# Altium PCB 100872.pcbdoc
Units mm, origin at the board's own origin, x right, y up, seen from the top; angles counter-clockwise.
Board outline 50 x 10 mm, 2 copper layers (Top Layer, Bottom Layer), stack 1.471 mm thick; 12 components, 5 nets, 23 pads, 10 vias.
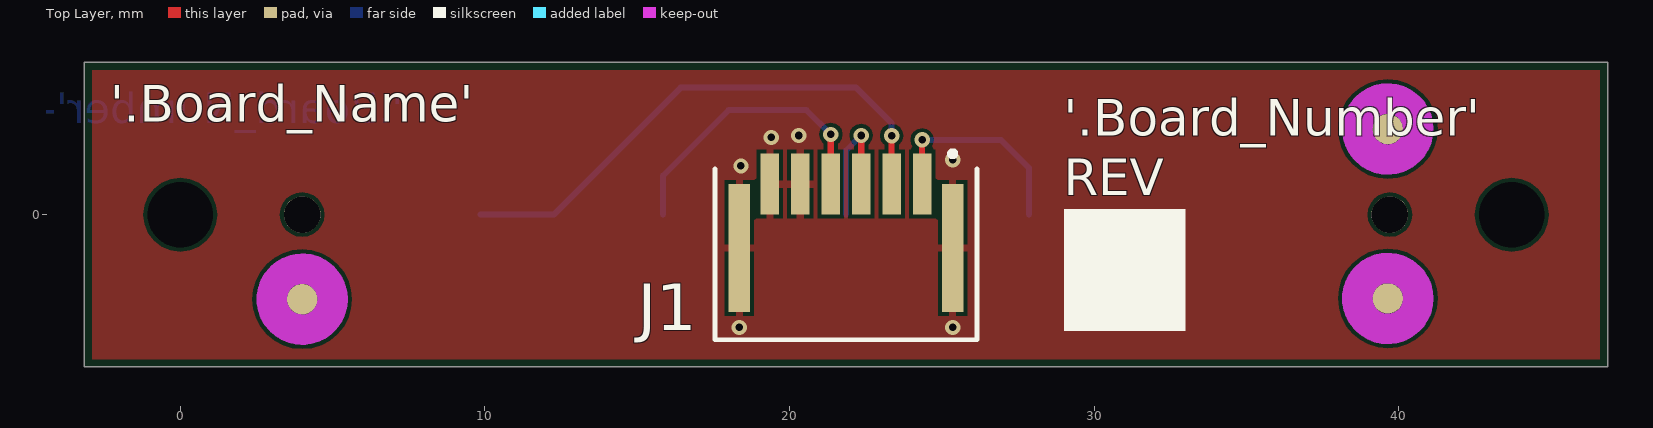
[diagram p0: Top Layer view]
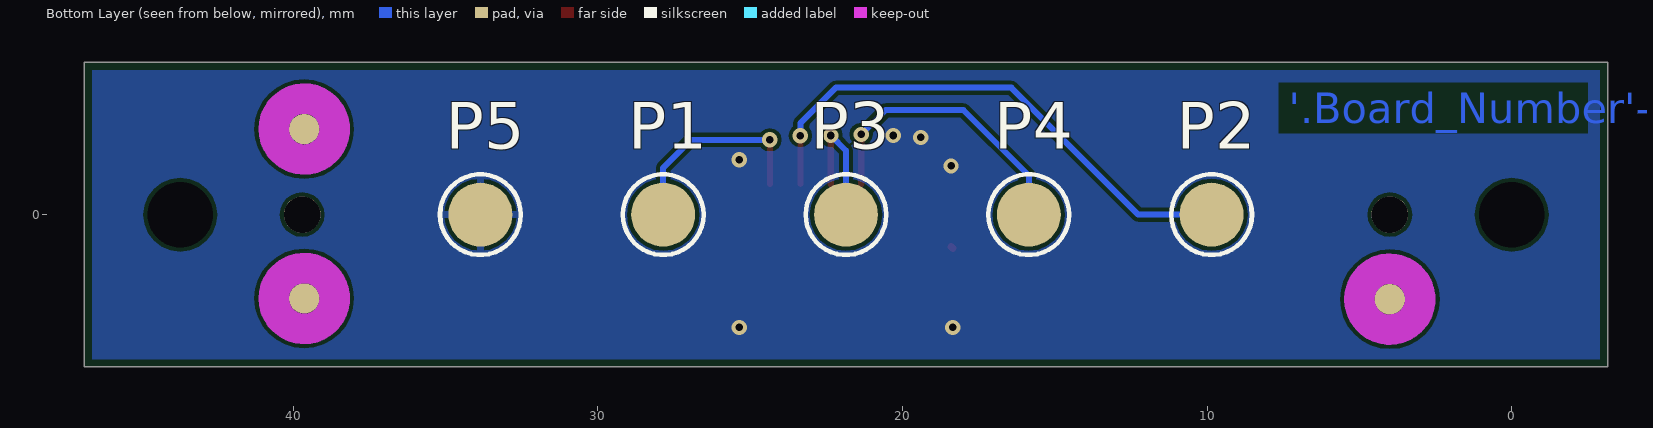
[diagram p1: Bottom Layer view, seen from below]

## Layer stack, top to bottom
Top Solder: solder mask 0.0102, Solder Resist, Dk 3.5
Top Layer: signal copper 0.0356
Dielectric 1: core 1.4, FR-4, Dk 4.2
Bottom Layer: signal copper 0.0356
Bottom Solder: solder mask 0.0102, Solder Resist, Dk 3.5

## Board outline
-3.15,-5 46.85,-5 46.85,5 -3.15,5

## Design rules (kind name [scope] priority, off if disabled: settings)
BoardOutlineClearance [All] p1: gap=0.25 except(0: Text-OutlineEdge)
Clearance [All] p1: gap=0.125
ComponentClearance [All] p1: gap=0.18 collisioncheckmode=3 verticalgap=0.18 showdistances=FALSE
HoleSize [All] p1: absolutevalues=TRUE maxlimit=2.7 minlimit=0.025 maxpercent=80.000 minpercent=20.000
MinimumSolderMaskSliver MinimumSolderMaskSliver_1 [isvia vs IsPad] p1: minsoldermaskwidth=0
MinimumSolderMaskSliver [All] p2: minsoldermaskwidth=0.05
PlaneClearance [All] p1: clearance=0.2
PlaneConnect [All] p1: planeconnectstyle=Direct reliefexpansion=0.508 reliefentries=4 reliefconductorwidth=0.254 reliefairgap=0.254
PolygonConnect MTG [InPadClass('Thick_thermal')] p1: connectstyle=Relief reliefconductorwidth=0.4 reliefentries=4 polygonreliefangle="90 Angle" airgapwidth=0.125
PolygonConnect POLY_VIA [IsVia vs IsPolygon] p2: connectstyle=Direct reliefconductorwidth=0.254 reliefentries=4 polygonreliefangle="90 Angle" airgapwidth=0.254
PolygonConnect PolygonConnect_1 [All] p3: connectstyle=Relief reliefconductorwidth=0.25 reliefentries=4 polygonreliefangle="90 Angle" airgapwidth=0.125
RoomDefinition Handle_Interconnect [InComponentClass('Handle_Interconnect')] p1: confinementstyle=ConfineIn formatcopy=TRUE lockcomponents=FALSE outline -2.985,-5.067 47.079,-5.067 47.079,5 -2.985,5
RoutingVias [All] p1: holewidth=0.25 width=0.5 viastyle="Through Hole" minholewidth=0.25 minwidth=0.5 maxholewidth=0.25 maxwidth=0.5
SilkToSilkClearance [All] p1 off: silktosilkclearance=0.05
SilkToSolderMaskClearance [IsPad] p1: minsilkscreentomaskgap=0.125 clearancetoexposedcopper=TRUE
SolderMaskExpansion [All] p1: expansion=0.05
Width PWR_GND [InNetClass('PWR_GND')] p1: maxlimit=0.25 minlimit=0.25 preferedwidth=0.25
Width CRITICAL [InNetClass('MOTOR_DRIVERS')] p2: maxlimit=0.4 minlimit=0.3 preferedwidth=0.4
Width [All] p3: maxlimit=0.5 minlimit=0.125 preferedwidth=0.125
23 further rules are at their usual default settings.

## Classes and differential pairs
pad class Thick_thermal: Free-1
net class PWR_GND: GND
component class Handle_Interconnect: J1 P1 P2 P3 P4 P5

## Components (designator, comment, footprint, x,y, rotation, side; value= is the part's Value field where it differs from the comment)
J1 "HFW6R-2STE1LF" CON_FCI_HFW6R 21.85,0 r180 top
P1 "POGO_137" POGO_MILLMAX_0900-76 27.85,0 r180 bottom
P2 "POGO_137" POGO_MILLMAX_0900-76 9.85,0 r180 bottom
P3 "POGO_137" POGO_MILLMAX_0900-76 21.85,0 r180 bottom
P4 "POGO_137" POGO_MILLMAX_0900-76 15.85,0 r180 bottom
P5 "POGO_137" POGO_MILLMAX_0900-76 33.85,0 r180 bottom
? "Comment" Fiducial_c100opening300 4,-2.775 r0 top
? "Comment" Fiducial_c100opening300 39.634,2.81 r0 top
? "Comment" Fiducial_c100opening300 39.634,-2.75 r0 top
? "Comment" Fiducial_c100opening300 4,-2.775 r180 bottom
? "Comment" Fiducial_c100opening300 39.634,2.81 r180 bottom
? "Comment" Fiducial_c100opening300 39.634,-2.75 r180 bottom

## Footprints (in the part's own frame and the unit in brackets; to place one, negate y for a bottom-side part, rotate by r counter-clockwise, add the part's x,y. Pads: shape width x height; smd on the part's side, far side on the other; paste and mask are expansions set on the pad)
CON_FCI_HFW6R [mm] "CON_JST_S3B-ZR-SM4A"
  rect 0.6x2 smd mask+0.05: 1(2.5,-1) 2(1.5,-1) 3(0.5,-1) 4(-0.5,-1) 5(-1.5,-1) 6(-2.5,-1)
  rect 0.7x4.2 smd mask+0.05: 7(3.5,1.1) 8(-3.5,1.1)
  silkscreen extent -4.3,-2.09 4.3,4.1, body extent -4.3,-1.6 4.3,4.1, height 2
Fiducial_c100opening300 [mm]
  round 1 smd paste-10 mask+1: 0(0,0)
  Top Layer keep-out circle w1: c0,0 r1
POGO_MILLMAX_0900-76 [mm] "CONN SPRING LOADED PIN .137 GOLD"
  round 2.1 smd mask+0.05: 1(0,0)
  silkscreen extent -1.33,-1.32 1.33,1.32, body extent -0.91,-0.92 0.92,0.92, height 3.49

## Part data
J1: "CONN FFC FPC TOP 6POS 1.00MM R/A"
P1 P2 P3 P4 P5: library part 0900-0-15-20-76-14-11-0, "CONN SPRING LOADED PIN .137 GOLD"

## Free pads (board coordinates)
  round 1.2 hole 1.2 unplated: 0(4,0) 0(39.7,0)
  round 2 hole 2.15 unplated: 1(0,0) 1(43.7,0)

## Via types
v1: diameter 0.5, hole 0.25, Top Layer to Bottom Layer, tented both sides, 10 vias

## Nets (pads, with @x,y where several pads share a name; then routed paths per layer and width w, separated by ;. In a path a pad name is that pad's centre, name@x,y a point inside that pad or via, vN(x,y) a via of type N, cw(c..) or ccw(c..) an arc to the next point about the centre after c; other vN are vias at no path point)
BTN_MENU: J1.6 P1.1 | length 6.9
  Top Layer w0.2: J1.6 v1(24.35,2.457)
  Bottom Layer w0.2: v1(24.35,2.457) 26.93,2.457 27.85,1.536 P1.1
BTN_SYS: J1.3 P4.1 | length 9.6
  Top Layer w0.2: J1.3 v1(21.35,2.633)
  Bottom Layer w0.2: P4.1 15.85,1.285 18,3.435 20.549,3.435 v1(21.35,2.633)
BTN_TRACK: J1.4 P3.1 | length 4.4
  Top Layer w0.2: J1.4 v1(22.35,2.6)
  Bottom Layer w0.2: P3.1 21.85,2.1 v1(22.35,2.6)
BTN_TRIG: J1.5 P2.1 | length 17.7
  Top Layer w0.2: J1.5 v1(23.35,2.592)
  Bottom Layer w0.2: P2.1 12.257,0 16.425,4.168 22.182,4.168 23.35,3 v1(23.35,2.592)
GND: J1.1 J1.2 J1.7 J1.8 P5.1 | length 0.1
  Top Layer w0.25: J1.7 J1.7@18.4,-1.05
  other v1: 18.35,-3.7 25.35,-3.7 18.4,1.6 25.35,1.8 19.4,2.537 20.3,2.6
pads on no net: ?.0

## Polygon pours and split planes (outlines as drawn)
no net on FAB_DWG (solid): -327.868,-0.5 -326.868,-4.5 -327.868,-4 -328.868,-4.5 -327.868,-0.5
no net on FAB_DWG (solid): -327.868,23.5 -328.868,27.5 -327.868,27 -326.868,27.5 -327.868,23.5
no net on FAB_DWG (solid): -270.368,0 ccw(c-270.868,0) -270.868,0.5 ccw(c-270.868,0) -271.368,0 ccw(c-270.868,0) -270.868,-0.5 ccw(c-270.868,0) -270.368,0
no net on FAB_DWG (solid): -268.368,0 ccw(c-268.868,0) -268.868,0.5 ccw(c-268.868,0) -269.368,0 ccw(c-268.868,0) -268.868,-0.5 ccw(c-268.868,0) -268.368,0
no net on FAB_DWG (solid): -240.768,8.5 -241.268,7 -272.468,7 -272.968,8.5 -240.768,8.5
no net on FAB_DWG (solid): -272.968,15.5 -272.468,17 -241.268,17 -240.768,15.5 -272.968,15.5
no net on FAB_DWG (solid): -270.368,24 ccw(c-270.868,24) -270.868,24.5 ccw(c-270.868,24) -271.368,24 ccw(c-270.868,24) -270.868,23.5 ccw(c-270.868,24) -270.368,24
no net on FAB_DWG (solid): -268.368,24 ccw(c-268.868,24) -268.868,24.5 ccw(c-268.868,24) -269.368,24 ccw(c-268.868,24) -268.868,23.5 ccw(c-268.868,24) -268.368,24
no net on FAB_DWG (solid): -266.368,0 ccw(c-266.868,0) -266.868,0.5 ccw(c-266.868,0) -267.368,0 ccw(c-266.868,0) -266.868,-0.5 ccw(c-266.868,0) -266.368,0
no net on FAB_DWG (solid): -264.368,0 ccw(c-264.868,0) -264.868,0.5 ccw(c-264.868,0) -265.368,0 ccw(c-264.868,0) -264.868,-0.5 ccw(c-264.868,0) -264.368,0
no net on FAB_DWG (solid): -262.368,0 ccw(c-262.868,0) -262.868,0.5 ccw(c-262.868,0) -263.368,0 ccw(c-262.868,0) -262.868,-0.5 ccw(c-262.868,0) -262.368,0
no net on FAB_DWG (solid): -260.368,0 ccw(c-260.868,0) -260.868,0.5 ccw(c-260.868,0) -261.368,0 ccw(c-260.868,0) -260.868,-0.5 ccw(c-260.868,0) -260.368,0
no net on FAB_DWG (solid): -264.368,24 ccw(c-264.868,24) -264.868,24.5 ccw(c-264.868,24) -265.368,24 ccw(c-264.868,24) -264.868,23.5 ccw(c-264.868,24) -264.368,24
no net on FAB_DWG (solid): -266.368,24 ccw(c-266.868,24) -266.868,24.5 ccw(c-266.868,24) -267.368,24 ccw(c-266.868,24) -266.868,23.5 ccw(c-266.868,24) -266.368,24
no net on FAB_DWG (solid): -262.368,24 ccw(c-262.868,24) -262.868,24.5 ccw(c-262.868,24) -263.368,24 ccw(c-262.868,24) -262.868,23.5 ccw(c-262.868,24) -262.368,24
no net on FAB_DWG (solid): -260.368,24 ccw(c-260.868,24) -260.868,24.5 ccw(c-260.868,24) -261.368,24 ccw(c-260.868,24) -260.868,23.5 ccw(c-260.868,24) -260.368,24
no net on FAB_DWG (solid): -258.368,0 ccw(c-258.868,0) -258.868,0.5 ccw(c-258.868,0) -259.368,0 ccw(c-258.868,0) -258.868,-0.5 ccw(c-258.868,0) -258.368,0
no net on FAB_DWG (solid): -256.368,0 ccw(c-256.868,0) -256.868,0.5 ccw(c-256.868,0) -257.368,0 ccw(c-256.868,0) -256.868,-0.5 ccw(c-256.868,0) -256.368,0
no net on FAB_DWG (solid): -252.368,0 ccw(c-252.868,0) -252.868,0.5 ccw(c-252.868,0) -253.368,0 ccw(c-252.868,0) -252.868,-0.5 ccw(c-252.868,0) -252.368,0
no net on FAB_DWG (solid): -254.368,0 ccw(c-254.868,0) -254.868,0.5 ccw(c-254.868,0) -255.368,0 ccw(c-254.868,0) -254.868,-0.5 ccw(c-254.868,0) -254.368,0
no net on FAB_DWG (solid): -256.368,24 ccw(c-256.868,24) -256.868,24.5 ccw(c-256.868,24) -257.368,24 ccw(c-256.868,24) -256.868,23.5 ccw(c-256.868,24) -256.368,24
no net on FAB_DWG (solid): -258.368,24 ccw(c-258.868,24) -258.868,24.5 ccw(c-258.868,24) -259.368,24 ccw(c-258.868,24) -258.868,23.5 ccw(c-258.868,24) -258.368,24
no net on FAB_DWG (solid): -252.368,24 ccw(c-252.868,24) -252.868,24.5 ccw(c-252.868,24) -253.368,24 ccw(c-252.868,24) -252.868,23.5 ccw(c-252.868,24) -252.368,24
no net on FAB_DWG (solid): -254.368,24 ccw(c-254.868,24) -254.868,24.5 ccw(c-254.868,24) -255.368,24 ccw(c-254.868,24) -254.868,23.5 ccw(c-254.868,24) -254.368,24
no net on FAB_DWG (solid): -244.368,0 ccw(c-244.868,0) -244.868,0.5 ccw(c-244.868,0) -245.368,0 ccw(c-244.868,0) -244.868,-0.5 ccw(c-244.868,0) -244.368,0
no net on FAB_DWG (solid): -250.368,0 ccw(c-250.868,0) -250.868,0.5 ccw(c-250.868,0) -251.368,0 ccw(c-250.868,0) -250.868,-0.5 ccw(c-250.868,0) -250.368,0
no net on FAB_DWG (solid): -248.368,0 ccw(c-248.868,0) -248.868,0.5 ccw(c-248.868,0) -249.368,0 ccw(c-248.868,0) -248.868,-0.5 ccw(c-248.868,0) -248.368,0
no net on FAB_DWG (solid): -246.368,0 ccw(c-246.868,0) -246.868,0.5 ccw(c-246.868,0) -247.368,0 ccw(c-246.868,0) -246.868,-0.5 ccw(c-246.868,0) -246.368,0
no net on FAB_DWG (solid): -244.368,24 ccw(c-244.868,24) -244.868,24.5 ccw(c-244.868,24) -245.368,24 ccw(c-244.868,24) -244.868,23.5 ccw(c-244.868,24) -244.368,24
no net on FAB_DWG (solid): -250.368,24 ccw(c-250.868,24) -250.868,24.5 ccw(c-250.868,24) -251.368,24 ccw(c-250.868,24) -250.868,23.5 ccw(c-250.868,24) -250.368,24
no net on FAB_DWG (solid): -248.368,24 ccw(c-248.868,24) -248.868,24.5 ccw(c-248.868,24) -249.368,24 ccw(c-248.868,24) -248.868,23.5 ccw(c-248.868,24) -248.368,24
no net on FAB_DWG (solid): -246.368,24 ccw(c-246.868,24) -246.868,24.5 ccw(c-246.868,24) -247.368,24 ccw(c-246.868,24) -246.868,23.5 ccw(c-246.868,24) -246.368,24
no net on FAB_DWG (solid): -242.368,0 ccw(c-242.868,0) -242.868,0.5 ccw(c-242.868,0) -243.368,0 ccw(c-242.868,0) -242.868,-0.5 ccw(c-242.868,0) -242.368,0
no net on FAB_DWG (solid): -242.368,24 ccw(c-242.868,24) -242.868,24.5 ccw(c-242.868,24) -243.368,24 ccw(c-242.868,24) -242.868,23.5 ccw(c-242.868,24) -242.368,24
no net on FAB_DWG (solid): 1029 vertices, not listed, extent 279.174,-71.37 420.22,-57.796
no net on FAB_DWG (solid): 89 vertices, not listed, extent 319.393,-61.562 325.813,-57.798
no net on FAB_DWG (solid): 74 vertices, not listed, extent 331.063,-64.533 338.456,-57.798
no net on FAB_DWG (solid): 83 vertices, not listed, extent 344.845,-63.299 349.75,-58.711
no net on FAB_DWG (solid): 82 vertices, not listed, extent 356.458,-61.943 362.803,-58.715
no net on ASY_DWG (solid): 1029 vertices, not listed, extent 279.174,-71.37 420.22,-57.796
no net on ASY_DWG (solid): 89 vertices, not listed, extent 319.393,-61.562 325.813,-57.798
no net on ASY_DWG (solid): 74 vertices, not listed, extent 331.063,-64.533 338.456,-57.798
no net on ASY_DWG (solid): 83 vertices, not listed, extent 344.845,-63.299 349.75,-58.711
no net on ASY_DWG (solid): 82 vertices, not listed, extent 356.458,-61.943 362.803,-58.715
no net on ASY_DWG_R (solid): 1029 vertices, not listed, extent -350.78,-71.37 -209.734,-57.796
no net on ASY_DWG_R (solid): 89 vertices, not listed, extent -256.373,-61.562 -249.954,-57.798
no net on ASY_DWG_R (solid): 74 vertices, not listed, extent -269.016,-64.533 -261.624,-57.798
no net on ASY_DWG_R (solid): 83 vertices, not listed, extent -280.311,-63.299 -275.406,-58.711
no net on ASY_DWG_R (solid): 82 vertices, not listed, extent -293.363,-61.943 -287.018,-58.715
no net on TITLEBLOCK (solid): 331 vertices, not listed, extent -28.805,-44.37 29.9,-37.75
no net on TITLEBLOCK (solid): -6.868,-37.97 -4.33,-40.288 -4.33,-37.97 -6.868,-37.97
no net on TITLEBLOCK (solid): -12.055,-37.97 -10.932,-39.179 -9.853,-37.97 -12.055,-37.97
no net on TITLEBLOCK (solid): -1.57,-39.87 -0.58,-38.07 0.32,-39.87 -1.57,-39.87
no net on TITLEBLOCK (solid): 26 vertices, not listed, extent 3.27,-39.27 5.97,-37.97
GND on Bottom Layer "GND_L02_P000" (solid, pour order 0): -4.2,5.8 -4.2,-5.8 48.3,-5.8 48.4,-5.7 48.5,-5.6 48.5,5.8 -1.4,5.8
GND on Top Layer "GND_L01_P002" (solid, pour order 2): -4.1,5.9 -4.1,-5.7 48.4,-5.7 48.5,-5.6 48.6,-5.5 48.6,5.9 -1.3,5.9

## Other copper
Top Layer:
  text ".Layer_Name" at -0.203,-63 h3.5
Bottom Layer:
  text "'.Board_Number'-R'.PCB_Revision'" at 7.325,3 h1
  text ".Layer_Name" at -4.694,-63 h3.5

## Silkscreen, mask and mechanical layers (free items; w line width, h text height)
Top Overlay:
  rectangle: 29,-3.811 33,0.189
  text "'.Board_Name'" at -2.3,3.043 h1.2
  text "'.Board_Number'" at 29,2.592 h1.2
  text "REV" at 29,0.633 h1.2
  text ".Layer_Name" at -1.044,-62.917 h3.5
Bottom Overlay:
  text ".Layer_Name" at -5.969,-62.842 h3.5
Top Paste:
  text ".Layer_Name" at -0.919,-63.617 h3.5
Bottom Paste:
  text ".Layer_Name" at -4.844,-63.583 h3.5
Top Solder:
  text ".Layer_Name" at -1.028,-63 h3.5
Bottom Solder:
  text ".Layer_Name" at -4.469,-63.117 h3.5
Drill Guide:
  text ".Layer_Name" at 21.431,-18.167 h3.81
Outline:
  lines w0.013: -3.15,-5 -3.15,5 ; -3.15,-5 46.85,-5 ; -3.15,-5 -3.15,5 ; -3.15,-5 46.85,-5 ; -3.15,5 46.85,5 ; -3.15,5 46.85,5 ; 46.85,-5 46.85,5 ; 46.85,-5 46.85,5
FAB_DWG:
  drawing of 171 lines, arcs and shapes, not listed
  text "1" at 363.056,386.618 h7.62
  text "6" at -188.276,386.44 h7.62
  text "5" at -77.684,386.364 h7.62
  text "7" at -298.207,386.313 h7.62
  text "4" at 31.917,386.212 h7.62
  text "3" at 142.686,386.212 h7.62
  text "2" at 252.719,386.212 h7.62
  text "REVISIONS" at 317.076,377.63 h2.54
  text "REV" at 234.784,370.63 h2.03
  text "DESCRIPTION" at 289.288,370.63 h2.03
  text "DATE" at 380.972,370.63 h2.03
  text "APRVD" at 406.16,370.63 h2.03
  text "NOTES: UNLESS OTHERWISE SPECIFIED" at -321.127,364.815 h2.03
  text "01" at 235.188,362.63 h2.54
  text "INITIAL RELEASE" at 246.22,362.63 h2.54
  text "07/21/2016" at 375.06,362.63 h2.54
  text "1   DIMENSIONS AND VALUES ARE METRIC." at -324.877,356.815 h2.03
  text "02" at 235.188,355.63 h2.54
  text "MODIFICATIONS FOR ALPHA 2 RELEASE." at 246.22,355.63 h2.54
  text "09/23/2016" at 375.06,355.63 h2.54
  text "2   FABRICATION OF PRINTED CIRCUIT BOARD SHALL BE IN ACCORDANCE WITH" at -324.877,350.815 h2.03
  text "IPC-6011 AND IPC-6012, CLASS 2, AND THE DESIGN INTENT OF IPC-2221 AND" at -324.877,346.815 h2.03
  text "IPC-2222,CLASS 2, AND SHALL MEET THE ACCEPTABILITY REQUIREMENTS OF" at -324.877,342.815 h2.03
  text "IPC-A-600. PRODUCE PCB USING GERBER OR ODB++ FILES PROVIDED." at -324.877,338.815 h2.03
  text "3   FABRICATION VENDOR MUST BE UL APPROVED AND BOARD SHALL BE MARKED WITH" at -324.877,332.815 h2.03
  text "A UL REGISTERED LOGO. MATERIAL MUST MEET UL 94V-0 FLAMMABILITY RATING." at -324.877,328.815 h2.03
  text "4   MATERIAL REQUIREMENTS: MANUFACTURER SHALL SELECT MATERIALS TO ACHIEVE A" at -324.877,322.815 h2.03
  text "BALANCED CONSTRUCTION WITH THE OPTION OF MODIFYING DIELECTRIC THICKNESS" at -324.877,318.815 h2.03
  text "D" at 424.905,316.946 h7.62
  text "D" at -359.777,316.794 h7.62
  text "TO MEET THE REQUIREMENTS SPECIFIED HEREIN." at -324.877,314.815 h2.03
  text "5   BASE MATERIALS: GLASS EPOXY FR4 OR EQUIVALENT PER IPC-4101 MEETING RoHS" at -324.877,308.815 h2.03
  text "REQUIREMENTS FOR PCB FABRICATION AND ASSEMBLY, NOT LESS THAN TG150," at -324.877,304.815 h2.03
  text "A  SEE LAYER DETAIL FOR LAYER STACK UP, ESTIMATED DIELECTRIC THICKNESS," at -324.877,300.815 h2.03
  text "AND COPPER WEIGHT." at -324.877,296.815 h2.03
  text "B  MANUFACTURER SHALL SUBMIT A PROPOSED STACK UP FOR SYNAPSE APPROVAL" at -324.877,292.815 h2.03
  text "IF MODIFICATION IS REQUIRED." at -324.877,288.815 h2.03
  text "C  NO MATERIAL SUBSTITUTIONS WILL BE ALLOWED WITHOUT SYNAPSE APPROVAL." at -324.877,284.815 h2.03
  text "6   PROCESSING ALLOWANCE:" at -324.877,278.815 h2.03
  text "A  LAYER REGISTRATION FROM PRIMARY SIDE TO SECONDARY SIDE SHALL NOT" at -324.877,274.815 h2.03
  text "EXCEED 0.13mm TOTAL." at -324.877,270.815 h2.03
  text "B  MAXIMUM BOW AND TWIST SHALL BE .75% PER IPC-TM-650." at -324.877,266.815 h2.03
  text "7   VIAS" at -324.877,260.815 h2.03
  text "A  VIAS WITH A FINISHED HOLE SIZE OF 0.25mm OR SMALLER DO NOT REQUIRE" at -324.877,256.815 h2.03
  text "A MINIMUM HOLE SIZE AND MAY BE PLATED SHUT OR FILLED WITH SOLDER" at -324.877,252.815 h2.03
  text "MASK. MINIMUM SOLDER PLATING MUST BE MAINTAINED." at -324.877,248.815 h2.03
  text "B  ALL 0.2MM VIA-IN-PADS TO BE FILLED WITH NON-CONDUCTIVE EXPOXY AND COPLANAR." at -324.877,244.815 h2.03
  text "8   CONDUCTORS:  COPPER FOIL SHALL BE IN ACCORDANCE WITH IPC-4562/0." at -324.877,238.815 h2.03
  text "A  FINISH. COPPER PLATE THICKNESS ON SURFACE COPPER AND PLATED" at -324.877,234.815 h2.03
  text "THROUGH HOLES TO BE 0.025mm MINIMUM." at -324.877,230.815 h2.03
  text "B  MINIMUM FINISH CONDUCTOR WIDTH IS 0.076mm" at -324.877,226.815 h2.03
  text "C  MINIMUM FINISHED CONDUCTOR SPACING (AIR GAP) INCLUDING PADS, VIAS," at -324.877,222.815 h2.03
  text "SHAPES, ETC. IS 0.076mm." at -324.877,218.815 h2.03
  text "9   FINAL FINISH SHALL BE ELECTROLESS NICKEL / IMMERSION GOLD (ENIG)." at -324.877,212.815 h2.03
  text "FINISH THICKNESS SHALL BE 3 TO 6 um [118 TO 236 MICROINCHES] OF NICKEL" at -324.877,208.815 h2.03
  text "AND 0.04 TO 0.125um [1.5 TO 5 MICROINCHES] OF GOLD." at -324.877,204.815 h2.03
  text "FINISH SHALL BE RoHS COMPLIANT AND MEET REQUIREMENTS OF IPC-4552." at -324.877,200.815 h2.03
  text "10  FILLETING IS NOT PERMITTED WITHOUT PRIOR SYNAPSE APPROVAL." at -324.877,194.815 h2.03
  text "C" at 424.905,191.495 h7.62
  text "C" at -359.904,191.292 h7.62
  text "11  SOLDER MASK AND COATING:  APPLY SOLDER MASK TO PRIMARY AND SECONDARY" at -324.877,188.815 h2.03
  text "SIDES OF PRINTED WIRING BOARD USING SUPPLIED GERBER FILES IN ACCORDANCE" at -324.877,184.815 h2.03
  text "WITH IPC-SM-840, THICKNESS BETWEEN 0.02 - 0.04mm, COLOR GREEN," at -324.877,180.815 h2.03
  text "CLASS 2." at -324.877,176.815 h2.03
  text "12  OVERALL BOARD THICKNESS SHALL BE MEASURED OVER FINAL FINISH INCLUDING" at -324.877,170.815 h2.03
  text "SOLDER MASK." at -324.877,166.815 h2.03
  text "13  SILKSCREEN:  APPLY SILKSCREEN (LEGEND) TO PRIMARY AND SECONDARY SIDES" at -324.877,160.815 h2.03
  text "OF PRINTED CIRCUIT BOARD. USE PERMANENT INK, NON-NUTRIENT, NON-" at -324.877,156.815 h2.03
  text "CONDUCTIVE POLYMER, COLOR WHITE, PER IPC-4781, TYPE 2. RELIEVE LEGEND" at -324.877,152.815 h2.03
  text "FROM ALL EXPOSED LANDS AND HOLES AS REQUIRED." at -324.877,148.815 h2.03
  text "14  ANY ALTERATIONS TO THE PROVIDED GERBER ARTWORK FILES MUST BE SUBMITTED" at -324.877,142.815 h2.03
  text "TO SYNAPSE FOR APPROVAL." at -324.877,138.815 h2.03
  text "15  IMPEDANCE REQUIREMENTS: LAYERS AND SIGNALS WITH CONTROLLED IMPEDANCES" at -325.019,133.133 h2.03
  text "ARE DETAILED IN THE CONTROLLED IMPEDANCE CHART. MANUFACTURER HAS THE" at -324.877,128.815 h2.03
  text "OPTION OF ADJUSTING THE DIELECTRIC THICKNESS AND TRACE WIDTHS AS" at -324.877,124.565 h2.03
  text "REQUIRED TO MEET THE SPECIFICATIONS CONTAINED IN THIS DRAWING." at -324.877,120.565 h2.03
  text "A  IMPEDANCE TOLERANCES ARE +/-10%." at -324.877,115.565 h2.03
  text "B  ANY ADJUSTMENTS TO DIELECTRIC THICKNESS OR TRACE WIDTHS MUST BE" at -324.877,110.815 h2.03
  text "APPROVED BY SYNAPSE." at -324.877,107.065 h2.03
  text "C  IMPEDANCE TEST RESULTS AND TEST COUPONS FROM EACH LOT SHALL BE" at -324.877,102.565 h2.03
  text "PROVIDED TO SYNAPSE." at -324.877,98.758 h2.03
  text "16  MARK MANUFACTURER NAME, INITIALS, OR LOGO, LOT NUMBER, DATE CODE," at -324.877,93.315 h2.03
  text "UL RECOGNITION MARK AND FLAME RATING IN ETCH OR SILKSCREEN." at -324.877,89.315 h2.03
  text "17  PANELIZATION: COORDINATE WITH SYNAPSE OR THE SYNAPSE SPECIFIED" at -324.877,83.565 h2.03
  text "ASSEMBLY VENDOR FOR PANEL SIZE AND CONFIGURATION. IF BOARDS ARE" at -324.877,79.565 h2.03
  text "NOT TO BE COMPLETELY ROUTED OUT, TRIM PANELIZATION TABS TO LESS" at -324.877,75.565 h2.03
  text "THAN 0.1mm UPON DE-PANELIZATION. AVOID PANELIZATION TABS IN AREAS" at -324.877,71.565 h2.03
  text "INDICATED ON THIS DRAWING." at -324.877,67.565 h2.03
  text "B" at -359.675,65.892 h7.62
  text "B" at 425.032,65.892 h7.62
  text "18  BOARD MUST BE ELECTRICALLY TESTED USING SUPPLIED IPC-356 NETLIST." at -324.877,62.565 h2.03
  text "COUNTER-SINK" at 207,46 h4
  text "2X Ø 2.15mm THRU ALL" at 208,38 h4
  text "V Ø 4.20mm x 90°" at 208,34 h4
  text "PRIMARY SIDE" at -267.86,33 h2.29
  text "SILKSCREEN" at -237.368,28 h2.29
  text "SOLDERMASK" at -237.368,22.5 h2.29
  text "1.50 +/-0.15" at -338.86,16 h2.29
  text "1 OZ CU" at -289.192,15.5 h2.29
  text "LAYER 1" at -237.368,15 h2.29
  text "SECONDARY SIDE" at 215.792,15 h2.5
  text "FINISHED" at -335.196,11 h2.29
  text "DIELECTRIC" at -294.688,11 h2.29
  text "1 OZ CU" at -289.192,6.5 h2.29
  text "LAYER 2" at -237.368,6.5 h2.29
  text "THICKNESS" at -336.612,6 h2.29
  text "SOLDERMASK" at -237.368,-1 h2.29
  text "SILKSCREEN" at -237.368,-7 h2.29
  text "SECONDARY SIDE" at -269.692,-11.5 h2.29
  text "LAYER DETAIL" at -281.252,-24.495 h5.08
  text "DIMENSIONS ARE FOR REFERENCE ONLY," at 1.15,-27 h2.29
  text "SCALE:NONE" at -267.528,-31.5 h2.29
  text "USE BOARD OUTLINE FOR DIMENSIONAL DATA." at -3.44,-31.79 h2.29
  text "A" at 424.778,-59.863 h7.62
  text "A" at -359.929,-59.99 h7.62
  text "APPROVALS" at 216.912,-63.37 h2.03
  text "DATE" at 259.972,-63.37 h2.03
  text "UNLESS OTHERWISE" at 160.964,-65.37 h2.54
  text "DESIGNER" at 200.22,-69.37 h2.03
  text "SPECIFIED" at 168.076,-70.37 h2.54
  text "DIMENSIONS ARE" at 162.996,-75.37 h2.54
  text "F. PRICE" at 204.22,-75.37 h2.54
  text "09/23/2016" at 254.06,-75.37 h2.54
  text "1511 Sixth Ave. Suite 300, Seattle, WA 98101 206.381.0898" at 291.308,-76.37 h2.54
  text "IN MILLIMETERS" at 162.996,-80.37 h2.54
  text "ENGINEER" at 200.22,-82.37 h2.03
  text "PRINTED CIRCUIT BOARD" at 317.716,-84.87 h3.81
  text "PROPRIETARY" at 112.456,-85.37 h3.81
  text "D. BRUEY" at 204.22,-88.37 h2.54
  text "TOLERANCES:" at 167.044,-90.37 h2.54
  text "AND" at 124.648,-91.37 h3.81
  text ".Board_Name" at 311.656,-93.117 h5.08
  text "MECH ENG" at 200.22,-95.37 h2.03
  text ".XX" at 165.724,-97.37 h2.29
  text "0.25" at 179.22,-97.37 h2.29
  text "CONFIDENTIAL" at 110.932,-97.87 h3.81
  text "SIZE" at 283.372,-99.37 h1.78
  text "DWG NO" at 294.22,-99.37 h1.78
  text "REV" at 402.084,-99.37 h1.78
  text "A. DAHLGREN" at 204.22,-101.37 h2.54
  text "THE INFORMATION CONTAINED IN" at 112.946,-102.12 h1.52
  text ".XXX" at 163.892,-104.37 h2.29
  text "0.127" at 179.22,-104.37 h2.29
  text "THIS DRAWING IS PROPRIETARY AND" at 111.122,-104.87 h1.52
  text "RESTRICTED. ANY REPRODUCTION" at 112.946,-107.62 h1.52
  text "601-" at 311.275,-109.071 h7.62
  text ".Board_Number" at 339.675,-109.171 h7.62
  text "D" at 283.172,-109.37 h7.62
  text ".PCB_Revision" at 397.616,-109.878 h7.62
  text "IN PART OR WHOLE WITHOUT THE" at 112.946,-110.37 h1.52
  text "ANGLES" at 166.228,-111.37 h2.29
  text "5" at 185.22,-111.37 h2.29
  text "EXPRESS WRITTEN PERMISSION" at 113.912,-113.12 h1.52
  text "OF THE OWNER IS PROHIBITED" at 113.912,-115.87 h1.52
  text "SCALE:NONE" at 284.1,-116.37 h1.78
  text "SHEET 1 OF 1" at 395.676,-116.37 h1.78
  text "1" at 363.26,-128.418 h7.62
  text "6" at -188.2,-128.57 h7.62
  text "5" at -77.761,-128.57 h7.62
  text "4" at 31.688,-128.849 h7.62
  text "3" at 142.508,-128.875 h7.62
  text "2" at 252.947,-128.875 h7.62
  text "7" at -298.309,-129.434 h7.62
ASY_DWG:
  circle w0.38: c188.963,-108.822 r0.829
  lines w0.3: 199.22,-118.37 199.22,-58.37 ; 199.22,-104.37 279.22,-104.37 ; 199.22,-91.37 279.22,-91.37 ; 199.22,-78.37 279.22,-78.37 420.22,-78.37 ; 199.22,-65.37 279.22,-65.37 ; 230.22,353.63 420.22,353.63 ; 230.545,360.722 230.22,360.63 420.22,360.63 ; 230.545,375.722 230.22,375.63 420.22,375.63 ; 244.22,346.63 244.22,375.63 ; 249.22,-118.37 249.22,-58.37 ; 279.22,-118.37 279.22,-58.37 ; 279.22,-112.37 420.22,-112.37 ; 279.22,-96.37 419.22,-96.37 ; 292.22,-112.37 292.22,-96.37 ; 369.22,346.63 369.22,375.63 ; 388.22,-112.37 388.22,-96.37 ; 400.22,346.63 400.22,375.63
  lines w0.38: 174.22,-104.37 176.22,-104.37 ; 174.22,-102.37 176.22,-102.37 ; 174.22,-97.37 176.22,-97.37 ; 174.22,-95.37 176.22,-95.37 ; 175.22,-103.37 175.22,-101.37 ; 175.22,-96.37 175.22,-94.37 ; 180.22,-111.37 182.22,-111.37 ; 180.22,-109.37 182.22,-109.37 ; 181.22,-110.37 181.22,-108.37
  lines w0.508: 200.242,382.834 200.242,395.788 ; 200.242,382.834 200.242,395.788 ; 200.242,382.834 200.242,395.788 ; -370.369,6.279 -351.065,6.279 -370.369,6.279 ; -370.369,6.736 -351.065,6.736 -370.369,6.736 ; -370.369,131.678 -351.065,131.678 -370.369,131.678 ; -370.369,132.136 -351.065,132.136 -370.369,132.136 ; -370.369,257.078 -351.065,257.078 -370.369,257.078 ; -370.369,257.535 -351.065,257.535 -370.369,257.535 ; -241.133,-131.821 -241.133,-118.867 -241.133,-131.821 ; -241.133,382.834 -241.133,395.788 -241.133,382.834 ; -240.676,-131.821 -240.676,-118.867 -240.676,-131.821 ; -240.676,382.834 -240.676,395.788 -240.676,382.834 ; -130.923,-131.821 -130.923,-118.867 -130.923,-131.821 ; -130.923,382.834 -130.923,395.788 -130.923,382.834 ; -130.466,-131.821 -130.466,-118.867 -130.466,-131.821 ; -130.466,382.834 -130.466,395.788 -130.466,382.834 ; -20.687,-131.821 -20.687,-118.867 -20.687,-131.821 ; -20.687,382.834 -20.687,395.788 -20.687,382.834 ; -20.23,-131.821 -20.23,-118.867 -20.23,-131.821 ; -20.23,382.834 -20.23,395.788 -20.23,382.834 ; 89.575,382.834 89.575,395.788 89.575,382.834 ; 90.032,382.834 90.032,395.788 90.032,382.834 ; 199.785,382.834 199.785,395.788 199.785,382.834 ; 309.996,383.088 309.996,395.788 309.996,383.088 ; 310.021,-131.821 310.021,-118.867 310.021,-131.821 ; 310.453,382.834 310.453,395.788 310.453,382.834 ; 310.478,-131.821 310.478,-118.867 310.478,-131.821 ; 420.46,6.279 439.764,6.279 420.46,6.279 ; 420.46,6.736 439.764,6.736 420.46,6.736 ; 420.46,131.704 439.764,131.704 420.46,131.704 ; 420.46,132.161 439.764,132.161 420.46,132.161 ; 420.46,257.129 439.764,257.129 420.46,257.129 ; 420.46,257.586 439.764,257.586 420.46,257.586
  lines w1: -350.78,-118.37 420.22,-118.37 420.22,382.63 -350.78,382.63 -350.78,-118.37
  lines w1.1: 90.22,-131.37 90.22,-118.37 ; 104.22,-118.37 104.22,-78.37 155.22,-78.37 ; 155.22,-118.37 155.22,-78.37 ; 199.22,-131.37 199.22,-118.37 ; 230.22,346.63 230.22,382.63 ; 230.22,367.63 420.22,367.63 ; 279.22,-58.37 155.22,-58.37 155.22,-78.37
  text "1" at 363.056,386.618 h7.62
  text "6" at -188.276,386.44 h7.62
  text "5" at -77.684,386.364 h7.62
  text "7" at -298.207,386.313 h7.62
  text "4" at 31.917,386.212 h7.62
  text "3" at 142.686,386.212 h7.62
  text "2" at 252.719,386.212 h7.62
  text "REVISIONS" at 317.076,377.63 h2.54
  text "REV" at 234.784,370.63 h2.03
  text "DESCRIPTION" at 289.288,370.63 h2.03
  text "DATE" at 380.972,370.63 h2.03
  text "APRVD" at 406.16,370.63 h2.03
  text "NOTES: UNLESS OTHERWISE SPECIFIED" at -338.655,370.53 h2.03
  text "1   RoHS COMPLIANT ASSEMBLY REQUIRED. ASSEMBLE PER IPC-A-610, CLASS 2," at -338.555,364.03 h2.03
  text "01" at 235.188,362.63 h2.54
  text "01" at 235.188,362.63 h2.54
  text "INITIAL RELEASE" at 246.22,362.63 h2.54
  text "07/21/2016" at 375.06,362.63 h2.54
  text "2   AQUEOUS BASED CLEANING AFTER SOLDER FOR ALL COMPONENTS IS PREFERRED, NO-CLEAN" at -338.461,358.825 h2.03
  text "02" at 235.188,355.63 h2.54
  text "09/23/2016" at 375.06,355.63 h2.54
  text "MODIFICATIONS FOR ALPHA 2 RELEASE." at 246.052,355.462 h2.54
  text "RoHS SOLDER PROCESS IS ACCEPTABLE." at -338.605,354.68 h2.03
  text "3   ITEM IDENTIFICATION: MARK REVISION NUMBER OF THIS DRAWING IN THE SPACE PROVIDED." at -338.78,348.88 h2.03
  text "D" at 424.905,316.946 h7.62
  text "D" at -359.777,316.794 h7.62
  text "C" at 424.905,191.495 h7.62
  text "C" at -359.904,191.292 h7.62
  text "B" at -359.675,65.892 h7.62
  text "B" at 425.032,65.892 h7.62
  text "ASSEMBLY TOP" at 2.079,-17.345 h3.81
  text "A" at 424.778,-59.863 h7.62
  text "A" at -359.929,-59.99 h7.62
  text "APPROVALS" at 216.912,-63.37 h2.03
  text "DATE" at 259.972,-63.37 h2.03
  text "UNLESS OTHERWISE" at 160.964,-65.37 h2.54
  text "DESIGNER" at 200.22,-69.37 h2.03
  text "SPECIFIED" at 168.076,-70.37 h2.54
  text "DIMENSIONS ARE" at 162.996,-75.37 h2.54
  text "F. PRICE" at 204.22,-75.37 h2.54
  text "09/23/2016" at 254.06,-75.37 h2.54
  text "1511 Sixth Ave. Suite 300, Seattle, WA 98101 206.381.0898" at 291.308,-76.37 h2.54
  text "IN MILLIMETERS" at 162.996,-80.37 h2.54
  text "ENGINEER" at 200.22,-82.37 h2.03
  text "PRINTED CIRCUIT BOARD ASSEMBLY" at 304,-84.87 h3.81
  text "PROPRIETARY" at 112.456,-85.37 h3.81
  text "D. BRUEY" at 204.22,-88.37 h2.54
  text "TOLERANCES:" at 167.044,-90.37 h2.54
  text "AND" at 124.648,-91.37 h3.81
  text ".Board_Name" at 317.904,-93.145 h5.08
  text "MECH ENG" at 200.22,-95.37 h2.03
  text ".XX" at 165.724,-97.37 h2.29
  text "0.25" at 179.22,-97.37 h2.29
  text "CONFIDENTIAL" at 110.932,-97.87 h3.81
  text "SIZE" at 283.372,-99.37 h1.78
  text "DWG NO" at 294.22,-99.37 h1.78
  text "REV" at 402.084,-99.37 h1.78
  text "A. DAHLGREN" at 204.22,-101.37 h2.54
  text "THE INFORMATION CONTAINED IN" at 112.946,-102.12 h1.52
  text ".XXX" at 163.892,-104.37 h2.29
  text "0.127" at 179.22,-104.37 h2.29
  text "THIS DRAWING IS PROPRIETARY AND" at 111.122,-104.87 h1.52
  text "RESTRICTED. ANY REPRODUCTION" at 112.946,-107.62 h1.52
  text "600-" at 309.975,-109.071 h7.62
  text ".Board_Number" at 339.675,-109.171 h7.62
  text "D" at 283.172,-109.37 h7.62
  text ".PCB_Revision" at 397.616,-109.878 h7.62
  text "IN PART OR WHOLE WITHOUT THE" at 112.946,-110.37 h1.52
  text "ANGLES" at 166.228,-111.37 h2.29
  text "5" at 185.22,-111.37 h2.29
  text "EXPRESS WRITTEN PERMISSION" at 113.912,-113.12 h1.52
  text "OF THE OWNER IS PROHIBITED" at 113.912,-115.87 h1.52
  text "SCALE:4:1" at 284.812,-116.37 h1.78
  text "SHEET 1 OF 2" at 395.676,-116.37 h1.78
  text "1" at 363.26,-128.418 h7.62
  text "6" at -188.2,-128.57 h7.62
  text "5" at -77.761,-128.57 h7.62
  text "4" at 31.688,-128.849 h7.62
  text "3" at 142.508,-128.875 h7.62
  text "2" at 252.947,-128.875 h7.62
  text "7" at -298.309,-129.434 h7.62
ASY_DWG_R:
  lines w0.3: -350.78,-112.37 -209.78,-112.37 ; -350.78,-78.37 -209.78,-78.37 ; -349.78,-96.37 -209.78,-96.37 ; -318.78,-112.37 -318.78,-96.37 ; -222.78,-112.37 -222.78,-96.37 ; -209.78,-118.37 -209.78,-58.37
  lines w0.508: -130.802,382.834 -130.802,395.788 ; -130.802,382.834 -130.802,395.788 ; -130.802,382.834 -130.802,395.788 ; -370.324,6.279 -351.02,6.279 -370.324,6.279 ; -370.324,6.736 -351.02,6.736 -370.324,6.736 ; -370.324,131.704 -351.02,131.704 -370.324,131.704 ; -370.324,132.161 -351.02,132.161 -370.324,132.161 ; -370.324,257.129 -351.02,257.129 -370.324,257.129 ; -370.324,257.586 -351.02,257.586 -370.324,257.586 ; -241.038,-131.821 -241.038,-118.867 -241.038,-131.821 ; -241.013,382.834 -241.013,395.788 -241.013,382.834 ; -240.581,-131.821 -240.581,-118.867 -240.581,-131.821 ; -240.556,383.088 -240.556,395.788 -240.556,383.088 ; -130.345,382.834 -130.345,395.788 -130.345,382.834 ; -20.592,382.834 -20.592,395.788 -20.592,382.834 ; -20.135,382.834 -20.135,395.788 -20.135,382.834 ; 89.67,-131.821 89.67,-118.867 89.67,-131.821 ; 89.67,382.834 89.67,395.788 89.67,382.834 ; 90.127,-131.821 90.127,-118.867 90.127,-131.821 ; 90.127,382.834 90.127,395.788 90.127,382.834 ; 199.906,-131.821 199.906,-118.867 199.906,-131.821 ; 199.906,382.834 199.906,395.788 199.906,382.834 ; 200.363,-131.821 200.363,-118.867 200.363,-131.821 ; 200.363,382.834 200.363,395.788 200.363,382.834 ; 310.116,-131.821 310.116,-118.867 310.116,-131.821 ; 310.116,382.834 310.116,395.788 310.116,382.834 ; 310.573,-131.821 310.573,-118.867 310.573,-131.821 ; 310.573,382.834 310.573,395.788 310.573,382.834 ; 420.505,6.279 439.809,6.279 420.505,6.279 ; 420.505,6.736 439.809,6.736 420.505,6.736 ; 420.505,131.678 439.809,131.678 420.505,131.678 ; 420.505,132.136 439.809,132.136 420.505,132.136 ; 420.505,257.078 439.809,257.078 420.505,257.078 ; 420.505,257.535 439.809,257.535 420.505,257.535
  lines w1: -350.78,-118.37 420.22,-118.37 420.22,382.63 -350.78,382.63 -350.78,-118.37
  lines w1.1: -129.78,-131.37 -129.78,-118.37 ; -20.78,-131.37 -20.78,-118.37
  text "1" at -293.616,386.618 h7.62
  text "6" at 257.716,386.44 h7.62
  text "5" at 147.124,386.364 h7.62
  text "7" at 367.647,386.313 h7.62
  text "2" at -183.279,386.212 h7.62
  text "3" at -73.246,386.212 h7.62
  text "4" at 37.523,386.212 h7.62
  text "NOTES: UNLESS OTHERWISE SPECIFIED" at 408.095,370.53 h2.03
  text "1   RoHS COMPLIANT ASSEMBLY REQUIRED. ASSEMBLE PER IPC-A-610, CLASS 2," at 407.995,364.03 h2.03
  text "2   AQUEOUS BASED CLEANING AFTER SOLDER FOR ALL COMPONENTS IS PREFERRED, NO-CLEAN" at 407.901,358.825 h2.03
  text "RoHS SOLDER PROCESS IS ACCEPTABLE." at 408.045,354.68 h2.03
  text "3   ITEM IDENTIFICATION: MARK REVISION NUMBER OF THIS DRAWING IN THE SPACE PROVIDED." at 408.22,348.88 h2.03
  text "D" at -355.465,316.946 h7.62
  text "D" at 429.217,316.794 h7.62
  text "C" at -355.465,191.495 h7.62
  text "C" at 429.344,191.292 h7.62
  text "B" at -355.592,65.892 h7.62
  text "B" at 429.115,65.892 h7.62
  text "ASSEMBLY BOTTOM" at 47.079,-17.345 h3.81
  text "A" at -355.338,-59.863 h7.62
  text "A" at 429.369,-59.99 h7.62
  text "1511 Sixth Ave. Suite 300, Seattle, WA 98101 206.381.0898" at -221.868,-76.37 h2.54
  text "PRINTED CIRCUIT BOARD ASSEMBLY" at -234.56,-84.87 h3.81
  text ".Board_Name" at -248.464,-93.145 h5.08
  text "REV" at -332.644,-99.37 h1.78
  text "DWG NO" at -224.78,-99.37 h1.78
  text "SIZE" at -213.932,-99.37 h1.78
  text "600-" at -240.535,-109.071 h7.62
  text ".Board_Number" at -270.235,-109.171 h7.62
  text "D" at -213.732,-109.37 h7.62
  text ".PCB_Revision" at -329.069,-109.892 h7.62
  text "SHEET 2 OF 2" at -326.236,-116.37 h1.78
  text "SCALE:4:1" at -215.372,-116.37 h1.78
  text "1" at -293.82,-128.418 h7.62
  text "5" at 147.201,-128.57 h7.62
  text "6" at 257.64,-128.57 h7.62
  text "4" at 37.752,-128.849 h7.62
  text "2" at -183.507,-128.875 h7.62
  text "3" at -73.068,-128.875 h7.62
  text "7" at 367.749,-129.434 h7.62
TITLEBLOCK:
  lines w0.25: -28.68,-56.87 92.32,-56.87 ; 29.82,-37.87 92.32,-37.87 92.32,-66.37 -28.68,-66.37 -28.68,-44.37 92.32,-44.37 ; 47.82,-66.37 47.82,-37.87 ; 47.82,-49.37 92.32,-49.37 ; 81.32,-56.87 81.32,-49.37
  text "PRODUCT" at 34.064,-40.37 h1.52
  text "1511 SIXTH AVENUE, THIRD FLOOR" at 48.82,-40.37 h1.52
  text "DEVELOPMENT" at 32.132,-43.37 h1.52
  text "SEATTLE,WA 98101  206.381.0898" at 48.82,-43.37 h1.52
  text "DATE" at 48.82,-46.37 h1.02
  text "09/23/2016" at 61.7,-47.87 h2.03
  text "PRINTED CIRCUIT BOARD" at -9.916,-48.87 h2.29
  text "PART NUMBER" at 48.82,-51.37 h1.02
  text "REV" at 85.596,-51.37 h1.02
  text ".Board_Name" at -15.65,-55 h3.81
  text "601-" at 54.475,-55.071 h2.54
  text ".Board_Number" at 64.775,-55.071 h2.54
  text ".PCB_Revision" at 84.62,-55.538 h2.54
  text "PROPRIETARY AND CONFIDENTIAL" at 53.046,-59.87 h1.52
  text "THE INFORMATION CONTAINED IN THIS DRAWING IS PROPRIETARY AND" at 51.83,-61.87 h0.76
  text "RESTRICTED. ANY REPRODUCTION IN PART OR WHOLE WITHOUT THE" at 52.742,-63.37 h0.76
  text "EXPRESS WRITTEN PERMISSION OF THE OWNER IS PROHIBITED" at 53.458,-64.87 h0.76
DXF_TOP:
  circle w0.013: c7.662,254.501 r1.075
  circle w0.013: c51.362,254.501 r1.075
  circle w0.013: c11.662,254.501 r0.6
  circle w0.013: c47.362,254.501 r0.6
  circle w0.013: c128.512,254.302 r1.075
  circle w0.013: c168.212,254.302 r0.6
  circle w0.013: c172.212,254.302 r1.075
  circle w0.013: c132.512,254.302 r0.6
  circle w0.013: c293.755,255.141 r1.075
  circle w0.013: c250.055,255.141 r1.075
  circle w0.013: c289.755,255.141 r0.6
  circle w0.013: c254.055,255.141 r0.6
  circle w0.013: c39.7,0 r0.6
  circle w0.013: c4,0 r0.6
  circle w0.013: c43.7,0 r1.075
  circle w0.013: c0,0 r1.075
  circle w0.013: c4,0 r0.6
  circle w0.013: c39.7,0 r0.6
  circle w0.013: c0,0 r1.075
  circle w0.013: c43.7,0 r1.075
  lines w0.013: -3.15,-5 -3.15,5 ; -3.15,-5 46.85,-5 ; -3.15,-5 -3.15,5 ; -3.15,-5 46.85,-5 ; -3.15,5 46.85,5 ; -3.15,5 46.85,5 ; 46.85,-5 46.85,5 ; 46.85,-5 46.85,5 ; 146.062,249.302 146.062,256.552 154.662,256.552 154.662,249.302 ; 146.062,249.302 125.362,249.302 125.362,259.302 175.362,259.302 175.362,249.302 154.662,249.302 ; 146.062,249.302 154.662,249.302 ; 4.512,249.501 54.512,249.501 54.512,259.501 4.512,259.501 4.512,249.501 ; 17.55,-4.25 17.55,2.25 26.15,2.25 26.15,-4.25 17.55,-4.25 ; 246.905,250.141 296.905,250.141 296.905,260.141 246.905,260.141 246.905,250.141 ; 267.605,250.891 276.205,250.891 276.205,257.391 267.605,257.391 267.605,250.891
  text "KEEP WITHIN/KEEP OUT" at 127.14,288.837 h3.17
  text "BOARD OUTLINE" at 13.973,287.577 h3.17
  text "COMPONENT PLACEMENT" at 242.966,286.956 h3.17
  text "PRIMARY" at -33.84,256.49 h3.17
DXF_BOT:
  circle w0.013: c273.089,188.594 r0.914
  circle w0.013: c273.089,188.594 r0.813
  circle w0.013: c273.089,188.594 r0.749
  circle w0.013: c273.089,188.594 r0.533
  circle w0.013: c285.089,188.594 r0.914
  circle w0.013: c285.089,188.594 r0.813
  circle w0.013: c285.089,188.594 r0.749
  circle w0.013: c285.089,188.594 r0.533
  circle w0.013: c279.089,188.594 r0.914
  circle w0.013: c279.089,188.594 r0.813
  circle w0.013: c279.089,188.594 r0.749
  circle w0.013: c279.089,188.594 r0.533
  circle w0.013: c267.089,188.594 r0.914
  circle w0.013: c267.089,188.594 r0.813
  circle w0.013: c267.089,188.594 r0.749
  circle w0.013: c267.089,188.594 r0.533
  circle w0.013: c261.089,188.594 r0.914
  circle w0.013: c261.089,188.594 r0.813
  circle w0.013: c261.089,188.594 r0.749
  circle w0.013: c261.089,188.594 r0.533
  circle w0.013: c251.239,188.594 r1.075
  circle w0.013: c294.939,188.594 r1.075
  circle w0.013: c251.239,188.594 r2.1
  circle w0.013: c294.939,188.594 r2.1
  circle w0.013: c290.939,188.594 r0.6
  circle w0.013: c255.239,188.594 r0.6
  circle w0.013: c172.806,188.807 r1.075
  circle w0.013: c129.106,188.807 r1.075
  circle w0.013: c172.806,188.807 r2.1
  circle w0.013: c129.106,188.807 r2.1
  circle w0.013: c133.106,188.807 r0.6
  circle w0.013: c168.806,188.807 r0.6
  circle w0.013: c52.975,190.742 r1.075
  circle w0.013: c9.275,190.742 r1.075
  circle w0.013: c52.975,190.742 r2.1
  circle w0.013: c9.275,190.742 r2.1
  circle w0.013: c13.275,190.742 r0.6
  circle w0.013: c48.975,190.742 r0.6
  circle w0.013: c4,0 r0.6
  circle w0.013: c39.7,0 r0.6
  circle w0.013: c43.7,0 r2.1
  circle w0.013: c0,0 r2.1
  circle w0.013: c43.7,0 r1.075
  circle w0.013: c0,0 r1.075
  circle w0.013: c9.85,0 r0.533
  circle w0.013: c9.85,0 r0.749
  circle w0.013: c9.85,0 r0.813
  circle w0.013: c9.85,0 r0.914
  circle w0.013: c15.85,0 r0.533
  circle w0.013: c15.85,0 r0.749
  circle w0.013: c15.85,0 r0.813
  circle w0.013: c15.85,0 r0.914
  circle w0.013: c27.85,0 r0.533
  circle w0.013: c27.85,0 r0.749
  circle w0.013: c27.85,0 r0.813
  circle w0.013: c27.85,0 r0.914
  circle w0.013: c33.85,0 r0.533
  circle w0.013: c33.85,0 r0.749
  circle w0.013: c33.85,0 r0.813
  circle w0.013: c33.85,0 r0.914
  circle w0.013: c21.85,0 r0.533
  circle w0.013: c21.85,0 r0.749
  circle w0.013: c21.85,0 r0.813
  circle w0.013: c21.85,0 r0.914
  lines w0.013: -3.15,-5 -3.15,5 46.85,5 46.85,-5 -3.15,-5 ; 6.125,185.742 6.125,195.742 56.125,195.742 56.125,185.742 6.125,185.742 ; 125.956,183.807 125.956,193.807 175.956,193.807 175.956,183.807 125.956,183.807 ; 248.089,183.594 298.089,183.594 298.089,193.594 248.089,193.594 248.089,183.594
  text "SECONDARY" at -37.771,193.194 h3.17
Drill Drawing:
  circle w0.254: c120.787,-4.817 r0.847
  lines w0.254: 119.94,-9.05 120.363,-9.05 120.787,-9.473 121.21,-9.05 121.633,-9.05 121.21,-8.627 121.633,-8.203 121.21,-8.203 120.787,-7.78 120.363,-8.203 119.94,-8.203 120.363,-8.627 119.94,-9.05 ; 119.94,-1.853 121.633,-1.853 121.633,-0.16 119.94,-0.16 119.94,-1.853
  lines w0.381: 118.421,-10.616 324.715,-10.616 ; 118.421,0.814 324.715,0.814 ; 132.414,-14.426 132.414,4.624 ; 145.872,-14.426 145.872,4.624 ; 173.55,-14.426 173.55,4.624 ; 186.399,-14.426 186.399,4.624 ; 205.038,-14.426 205.038,4.624 ; 243.127,-14.426 243.127,4.624 ; 258.109,-14.426 258.109,4.624 ; 277.052,-14.426 277.052,4.624 ; 296.097,-14.426 296.097,4.624 ; 118.421,-14.426 324.715,-14.426 324.715,4.624 118.421,4.624 118.421,-14.426
  text "Symbol" at 120.707,1.957 h1.83
  text "Count" at 133.557,1.957 h1.83
  text "Hole Size" at 147.015,1.957 h1.83
  text "Plated" at 174.693,1.957 h1.83
  text "Hole Type" at 187.542,1.957 h1.83
  text "Drill Layer Pair" at 206.181,1.957 h1.83
  text "Via/Pad" at 244.27,1.957 h1.83
  text "Pad Shape" at 259.252,1.957 h1.83
  text "Template" at 278.195,1.957 h1.83
  text "Hole Tolerance" at 297.24,1.957 h1.83
  text "10" at 133.557,-1.853 h1.52
  text "0.250mm (9.84mil)" at 147.015,-1.853 h1.52
  text "PTH" at 174.693,-1.853 h1.52
  text "Round" at 187.542,-1.853 h1.52
  text "Top Layer - Bottom Layer" at 206.181,-1.853 h1.52
  text "Via" at 244.27,-1.853 h1.52
  text "Rounded" at 259.252,-1.853 h1.52
  text "v50h25m0mx0" at 278.195,-1.853 h1.52
  text "2" at 133.557,-5.663 h1.52
  text "1.200mm (47.24mil)" at 147.015,-5.663 h1.52
  text "NPTH" at 174.693,-5.663 h1.52
  text "Round" at 187.542,-5.663 h1.52
  text "Top Layer - Bottom Layer" at 206.181,-5.663 h1.52
  text "Pad" at 244.27,-5.663 h1.52
  text "Rounded" at 259.252,-5.663 h1.52
  text "c120hn120" at 278.195,-5.663 h1.52
  text "2" at 133.557,-9.473 h1.52
  text "2.150mm (84.65mil)" at 147.015,-9.473 h1.52
  text "NPTH" at 174.693,-9.473 h1.52
  text "Round" at 187.542,-9.473 h1.52
  text "Top Layer - Bottom Layer" at 206.181,-9.473 h1.52
  text "Pad" at 244.27,-9.473 h1.52
  text "Rounded" at 259.252,-9.473 h1.52
  text "c200hn215" at 278.195,-9.473 h1.52
  text "14 Total" at 133.557,-13.283 h1.52
  text ".Layer_Name" at 18.35,-18.3 h3.81
DXF_TOP (Mech19):
  lines w0.013: 35.401,-7.367 38.081,-7.367 38.081,-3.767 35.401,-3.767 35.401,-7.367 ; 39.426,-3.767 39.426,-1.767 40.036,-1.767 40.036,-3.767 39.426,-3.767 ; 39.587,-1.963 ccw(c39.682,-1.962) 39.687,-2.056 ccw(c39.692,-1.959) 39.773,-2.014 39.754,-2.002 39.729,-2.024 39.688,-2.034 cw(c39.684,-1.959) 39.609,-1.961 cw(c39.683,-1.963) 39.688,-1.89 39.721,-1.896 39.754,-1.922 39.773,-1.91 39.742,-1.88 39.689,-1.867 ccw(c39.685,-1.965) 39.587,-1.963 ; 40.426,-3.767 40.426,-1.767 41.036,-1.767 41.036,-3.767 40.426,-3.767 ; 40.561,-1.871 40.637,-2.053 40.641,-2.053 40.701,-1.922 40.759,-2.053 40.764,-2.053 40.84,-1.871 40.817,-1.871 40.762,-2.002 40.703,-1.871 40.699,-1.871 40.64,-2.002 40.585,-1.871 40.561,-1.871 ; 41.426,-3.767 41.426,-1.767 42.036,-1.767 42.036,-3.767 41.426,-3.767 ; 41.619,-1.871 41.702,-2.053 41.705,-2.053 41.789,-1.871 41.765,-1.871 41.704,-2.004 41.643,-1.871 41.619,-1.871 ; 42.426,-3.767 43.036,-3.767 43.036,-1.767 42.426,-1.767 42.426,-3.767 ; 42.593,-1.958 42.593,-1.871 42.616,-1.871 42.616,-1.955 42.616,-1.979 42.619,-1.998 ccw(c42.671,-1.98) 42.675,-2.034 ccw(c42.68,-1.979) 42.731,-2 42.734,-1.975 42.734,-1.955 42.734,-1.871 42.757,-1.871 42.757,-1.96 cw(c42.678,-1.976) 42.675,-2.057 42.635,-2.049 42.605,-2.021 42.593,-1.958 ; 44.381,-7.367 47.061,-7.367 47.061,-3.767 44.381,-3.767 44.381,-7.367

## Dimensions
208.275,25 to 208.275,32 on FAB_DWG